# Altium PCB WorldClock.PcbDoc (part 10 of 13)
Units mil, origin at the board's own origin, x right, y up, seen from the top; angles counter-clockwise.
Board outline 3700 x 3850 mil, 2 copper layers (Top Layer, Bottom Layer); 227 components, 134 nets, 1324 pads, 248 vias.
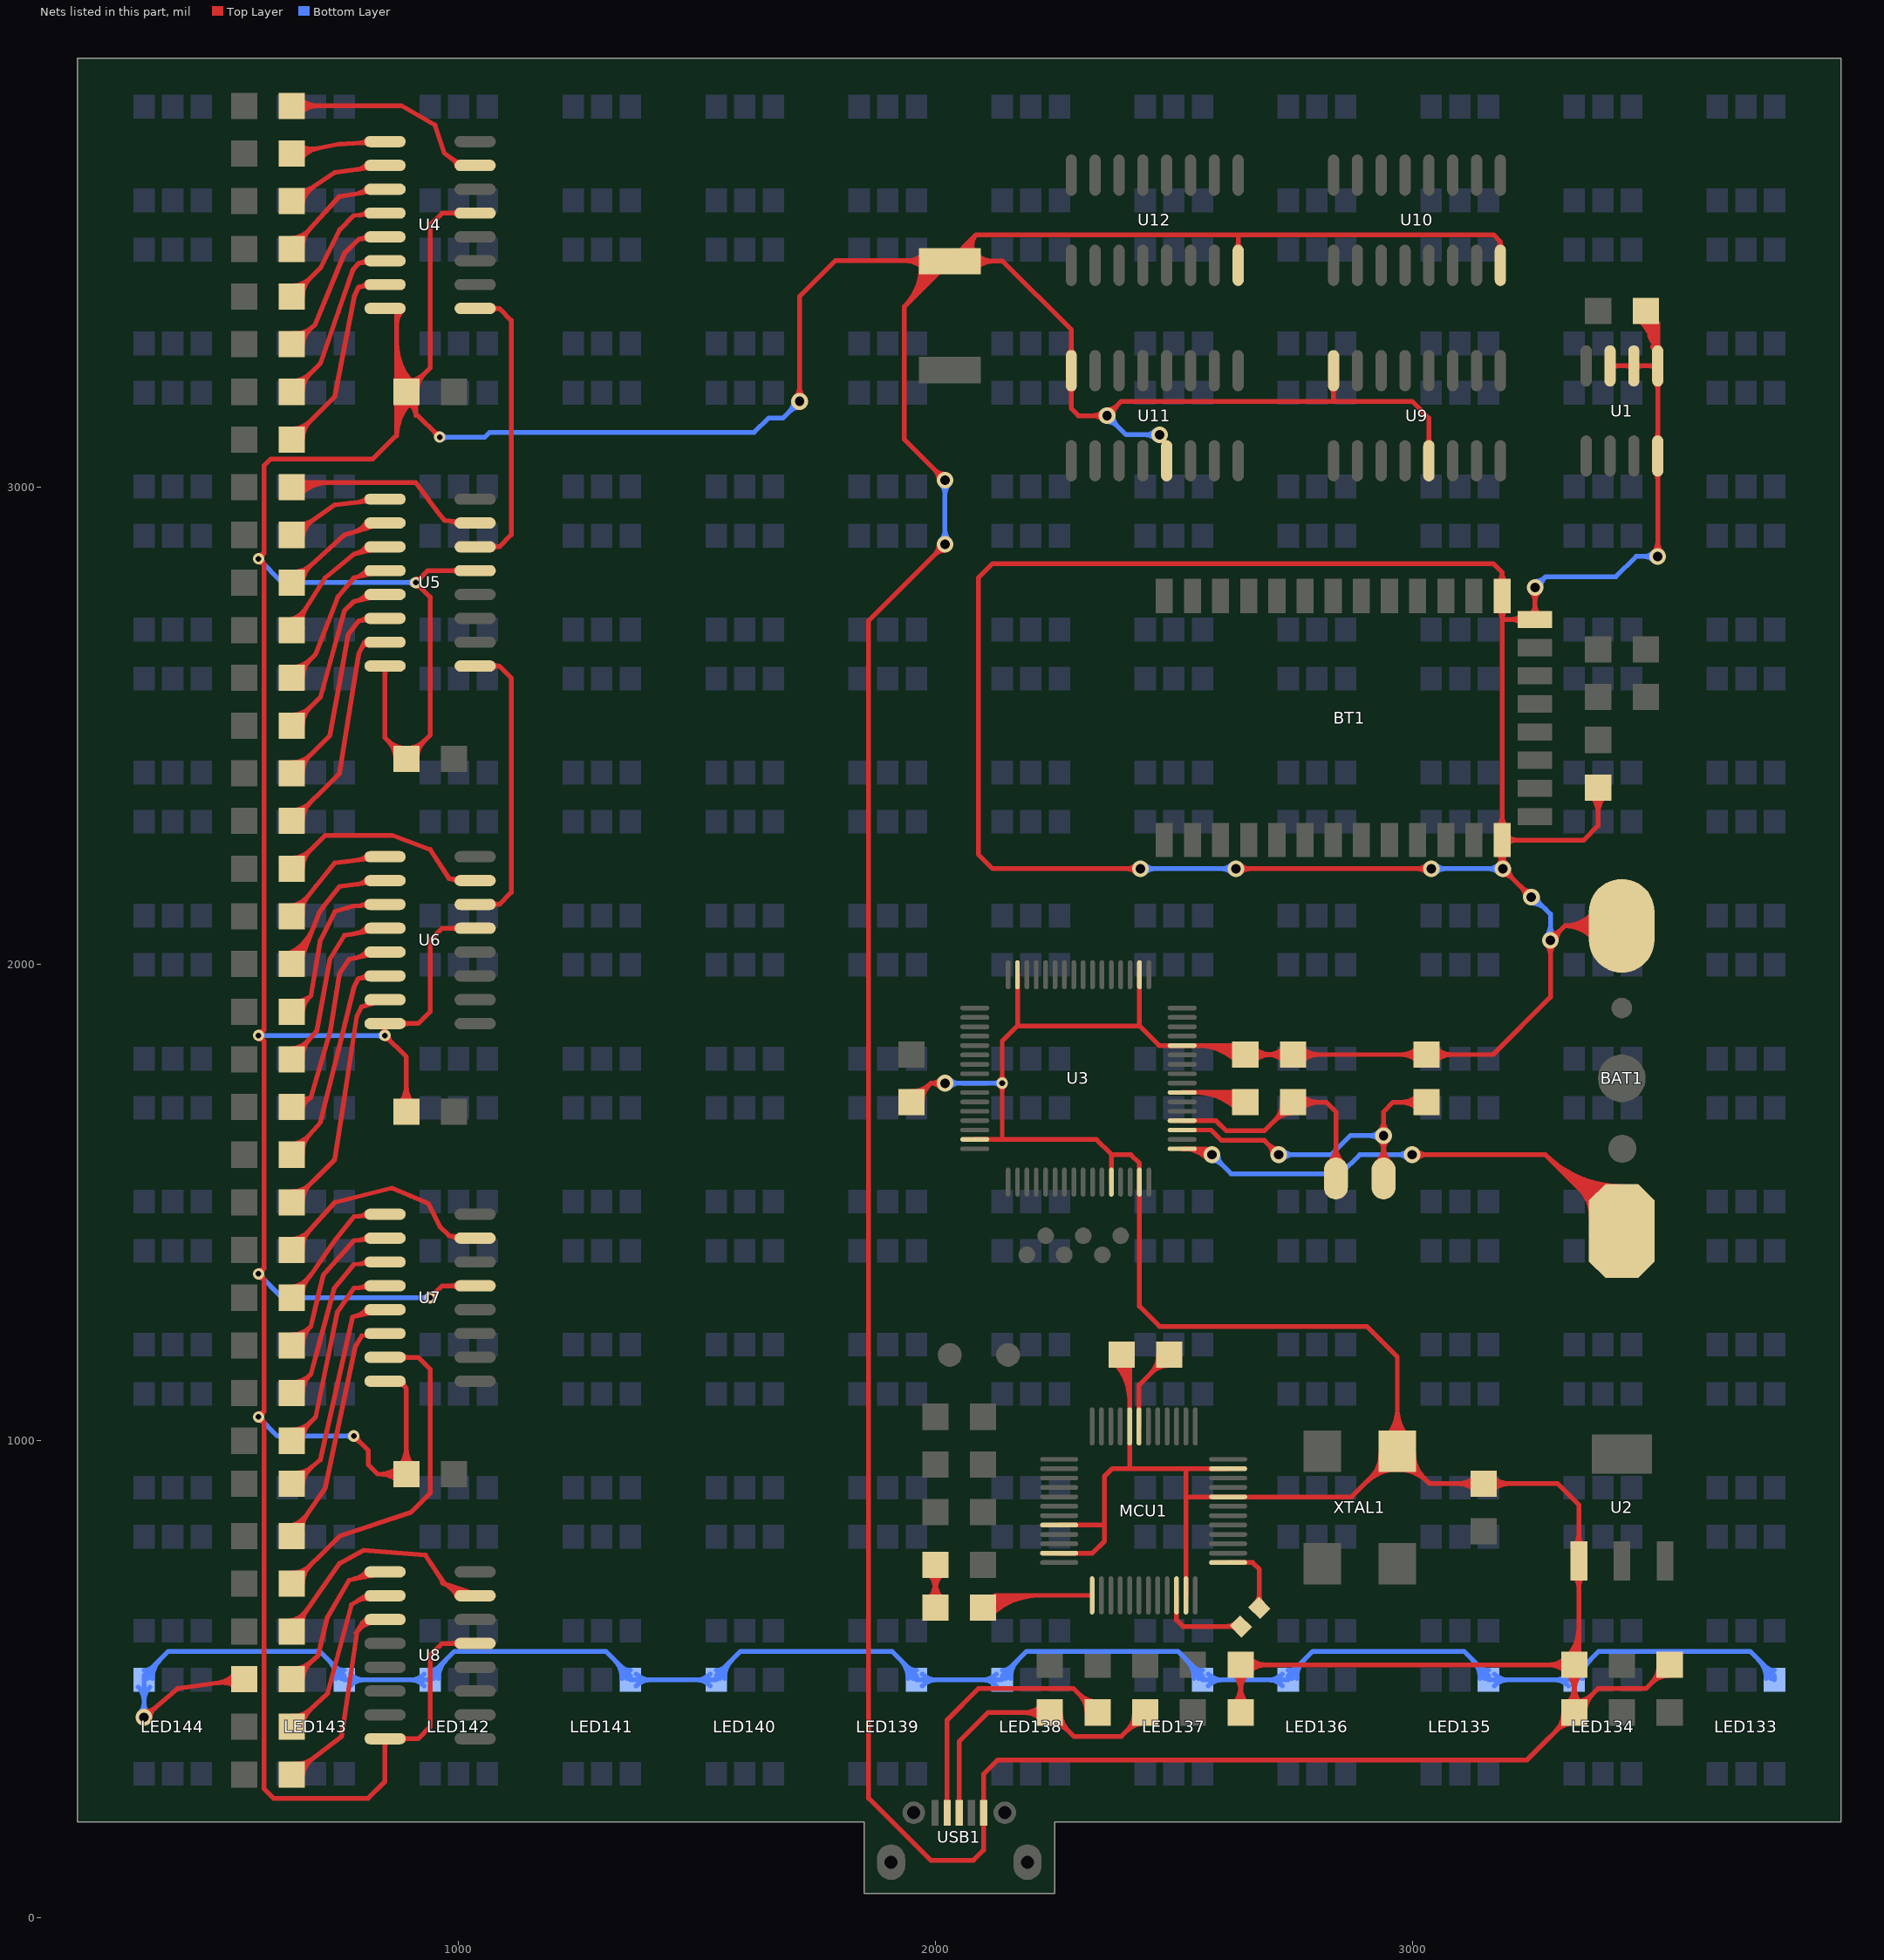
[diagram p10: the nets of this part, all layers, seen from the top]

## Via types
v1: diameter 35, hole 20, Top Layer to Bottom Layer, tented both sides, 213 vias
v2: diameter 24, hole 12, Top Layer to Bottom Layer, tented both sides, 35 vias

## Nets (pads, with @x,y where several pads share a name; then routed paths per layer and width w, separated by ;. In a path a pad name is that pad's centre, name@x,y a point inside that pad or via, vN(x,y) a via of type N, cw(c..) or ccw(c..) an arc to the next point about the centre after c; other vN are vias at no path point) (continued)
G12: LED133.3 LED134.1 LED135.3 LED136.1 LED137.3 LED138.1 LED139.3 LED140.1 LED141.3 LED142.1 LED143.3 LED144.1 R42.1 | length 6157.5
  Top Layer w10: v1(340,420) 410,480 R42.1@550,500 ; v1@340.96,432.46 ccw(c343.27,462.55) 362.91,439.64 ccw(c382.55,416.73) v1@352.46,419.04 ; R42.1@532,513.5 cw(c488.54,546.09) 496.23,492.32 cw(c503.91,438.54) R42.1@536.5,482 ; R42.1@540,507.5 cw(c515.86,525.61) 520.13,495.73 cw(c524.39,465.86) R42.1@542.5,490
  Bottom Layer w10: LED144.1@327.63,483.55 cw(c297.75,453.68) 340,453.68 cw(c382.25,453.68) LED144.1@352.37,483.55 ; v1@331.16,428.84 ccw(c309.82,450.18) 340,450.18 ccw(c370.18,450.18) v1@348.84,428.84 ; v1(340,420) LED144.1@340,498.43 340,507.14 391.29,558.43 708.71,558.43 760,507.14 LED143.3@760,498.43 LED142.1@940,498.43 940,507.14 991.29,558.43 1308.71,558.43 1360,507.14 LED141.3@1360,498.43 LED140.1@1540,498.43 1540,507.14 1591.29,558.43 1908.71,558.43 1960,507.14 LED139.3@1960,498.43 LED138.1@2140,498.43 2140,507.14 2191.29,558.43 2508.71,558.43 2560,507.14 LED137.3@2560,498.43 LED136.1@2740,498.43 2740,507.14 2791.29,558.43 3108.71,558.43 3160,507.14 LED135.3@3160,498.43 LED134.1@3340,498.43 3340,507.14 3391.29,558.43 3708.71,558.43 3760,507.14 LED133.3@3760,498.43 ; LED144.1@340,518.43 ccw(c340,545.67) 359.27,526.41 ; LED144.1@347.5,500.93 cw(c380.61,500.93) 357.2,524.34 ; LED144.1@357.5,500.93 cw(c414.75,500.93) 374.27,541.41 ; 725.73,541.41 cw(c685.25,500.93) LED143.3@742.5,500.93 ; 740.73,526.41 ccw(c760,545.67) LED143.3@760,518.43 ; 742.8,524.34 cw(c719.39,500.93) LED143.3@752.5,500.93 ; LED143.3@772.37,486.05 cw(c802.25,456.18) 802.25,498.43 cw(c802.25,540.67) LED143.3@772.37,510.8 ; LED142.1@927.63,486.05 ccw(c897.75,456.18) 897.75,498.43 ccw(c897.75,540.67) LED142.1@927.63,510.8 ; LED142.1@940,518.43 ccw(c940,545.67) 959.27,526.41 ; LED142.1@947.5,500.93 cw(c980.61,500.93) 957.2,524.34 ; LED142.1@957.5,500.93 cw(c1014.75,500.93) 974.27,541.41 ; 1325.73,541.41 cw(c1285.25,500.93) LED141.3@1342.5,500.93 ; 1340.73,526.41 ccw(c1360,545.67) LED141.3@1360,518.43 ; 1342.8,524.34 cw(c1319.39,500.93) LED141.3@1352.5,500.93 ; LED141.3@1372.37,486.05 cw(c1402.25,456.18) 1402.25,498.43 cw(c1402.25,540.67) LED141.3@1372.37,510.8 ; LED140.1@1527.63,486.05 ccw(c1497.75,456.18) 1497.75,498.43 ccw(c1497.75,540.67) LED140.1@1527.63,510.8 ; LED140.1@1540,518.43 ccw(c1540,545.67) 1559.27,526.41 ; LED140.1@1547.5,500.93 cw(c1580.61,500.93) 1557.2,524.34 ; LED140.1@1557.5,500.93 cw(c1614.75,500.93) 1574.27,541.41 ; 1925.73,541.41 cw(c1885.25,500.93) LED139.3@1942.5,500.93 ; 1940.73,526.41 ccw(c1960,545.67) LED139.3@1960,518.43 ; 1942.8,524.34 cw(c1919.39,500.93) LED139.3@1952.5,500.93 ; LED139.3@1972.37,486.05 cw(c2002.25,456.18) 2002.25,498.43 cw(c2002.25,540.67) LED139.3@1972.37,510.8 ; LED138.1@2127.63,486.05 ccw(c2097.75,456.18) 2097.75,498.43 ccw(c2097.75,540.67) LED138.1@2127.63,510.8 ; LED138.1@2140,518.43 ccw(c2140,545.67) 2159.27,526.41 ; LED138.1@2147.5,500.93 cw(c2180.61,500.93) 2157.2,524.34 ; LED138.1@2157.5,500.93 cw(c2214.75,500.93) 2174.27,541.41 ; 2525.73,541.41 cw(c2485.25,500.93) LED137.3@2542.5,500.93 ; 2540.73,526.41 ccw(c2560,545.67) LED137.3@2560,518.43 ; 2542.8,524.34 cw(c2519.39,500.93) LED137.3@2552.5,500.93 ; LED137.3@2572.37,486.05 cw(c2602.25,456.18) 2602.25,498.43 cw(c2602.25,540.67) LED137.3@2572.37,510.8 ; LED136.1@2727.63,486.05 ccw(c2697.75,456.18) 2697.75,498.43 ccw(c2697.75,540.67) LED136.1@2727.63,510.8 ; LED136.1@2740,518.43 ccw(c2740,545.67) 2759.27,526.41 ; LED136.1@2747.5,500.93 cw(c2780.61,500.93) 2757.2,524.34 ; LED136.1@2757.5,500.93 cw(c2814.75,500.93) 2774.27,541.41 ; 3125.73,541.41 cw(c3085.25,500.93) LED135.3@3142.5,500.93 ; 3140.73,526.41 ccw(c3160,545.67) LED135.3@3160,518.43 ; 3142.8,524.34 cw(c3119.39,500.93) LED135.3@3152.5,500.93 ; LED135.3@3172.37,486.05 cw(c3202.25,456.18) 3202.25,498.43 cw(c3202.25,540.67) LED135.3@3172.37,510.8 ; LED134.1@3327.63,486.05 ccw(c3297.75,456.18) 3297.75,498.43 ccw(c3297.75,540.67) LED134.1@3327.63,510.8 ; LED134.1@3340,518.43 ccw(c3340,545.67) 3359.27,526.41 ; LED134.1@3347.5,500.93 cw(c3380.61,500.93) 3357.2,524.34 ; LED134.1@3357.5,500.93 cw(c3414.75,500.93) 3374.27,541.41 ; 3725.73,541.41 cw(c3685.25,500.93) LED133.3@3742.5,500.93 ; 3740.73,526.41 ccw(c3760,545.67) LED133.3@3760,518.43 ; 3742.8,524.34 cw(c3719.39,500.93) LED133.3@3752.5,500.93
GND: BAT1.2 BT1.13 BT1.21 BT1.22 C1.1 C2.1 C3.1 C4.1 C5.2 C6.2 C7.1 C8.2 C9.1 C10.1 C11.1 C12.2 C13.2 C14.2 C15.2 C16.2 C17.2 C18.1 MCU1.8 MCU1.20 MCU1.23 MCU1.35 MCU1.44 MCU1.47 U1.4 U1.5 U1.6 U1.7 U2.1 U3.12 U3.18 U3.31 U3.47 U3.60 U3.63 U4.8 U4.13 U5.8 U5.13 U6.8 U6.13 U7.8 U7.13 U8.8 U8.13 U9.8 U9.13 U10.8 U11.8 U11.13 U12.8 USB1.5 XTAL1.2 | length 39367.2
  Top Layer w10: v2@580.19,1043 cw(c580.62,1027.62) 591.5,1038.5 ; v2@580.19,1057 ccw(c580.62,1072.38) 591.5,1061.5 ; v2@580.19,1343 cw(c580.62,1327.62) 591.5,1338.5 ; v2@580.19,1357 ccw(c580.62,1372.38) 591.5,1361.5 ; v2@580.19,1843 cw(c580.62,1827.62) 591.5,1838.5 ; v2@580.19,1857 ccw(c580.62,1872.38) 591.5,1861.5 ; v2@580.19,2843 cw(c580.62,2827.62) 591.5,2838.5 ; v2@580.19,2857 ccw(c580.62,2872.38) 591.5,2861.5 ; v2@587,1049.81 ccw(c602.38,1049.38) 591.5,1038.5 ; v2@587,1050.19 cw(c602.38,1050.62) 591.5,1061.5 ; v2@587,1349.81 ccw(c602.38,1349.38) 591.5,1338.5 ; v2@587,1350.19 cw(c602.38,1350.62) 591.5,1361.5 ; v2@587,1849.81 ccw(c602.38,1849.38) 591.5,1838.5 ; v2@587,1850.19 cw(c602.38,1850.62) 591.5,1861.5 ; v2@587,2849.81 ccw(c602.38,2849.38) 591.5,2838.5 ; v2@587,2850.19 cw(c602.38,2850.62) 591.5,2861.5 ; v2@780,1003 cw(c780,986.1) 791.95,998.05 cw(c803.9,1010) v2@787,1010 ; v2(780,1010) 810,980 810,950 830,930 C16.2@890,930 890,1110 ; v2@840.05,1854.95 ccw(c828.1,1866.9) 845,1866.9 ccw(c861.9,1866.9) v2@849.95,1854.95 ; U8.8@840.7,370.18 cw(c829.07,358.56) 845.51,358.56 cw(c861.95,358.56) U8.8@850.33,370.18 ; U6.8@840.7,1870.18 cw(c830.3,1859.79) v2@845,1859.79 ; U5.8@840.7,2620.18 cw(c829.07,2608.56) 845.51,2608.56 cw(c861.95,2608.56) U5.8@850.33,2620.18 ; v2@841.38,1855.99 ccw(c838.19,1861.3) 844.17,1862.9 ; v2@841.5,1856.06 ccw(c836.28,1865.09) 846.36,1862.4 ; v2@845,1843 cw(c845,1826.1) 856.95,1838.05 cw(c868.9,1850) v2@852,1850 ; v2@845,1857.32 cw(c863.19,1857.32) U6.8@850.33,1870.18 ; U6.8@845,1874.49 v2(845,1850) 890,1805 C14.2@890,1690 ; U7.8@845.51,1125 875,1125 890,1110 ; U6.8@845.51,1875 915,1875 940,1900 940,2050 965,2075 U6.13@1034.49,2075 ; U5.8@845.51,2625 845.51,2474.49 C17.2@890,2430 940,2480 940,2770 v2(910,2800) 935,2825 U5.13@1034.49,2825 ; U4.8@845.51,3375 845,3374.49 860.51,3374.49 870,3365 870,3220 C15.2@890,3200 ; U6.8@846.59,1863.25 ccw(c853.59,1861.37) v2@849.22,1855.59 ; C17.2@867.5,2430 ccw(c813.18,2430) 851.59,2468.41 ccw(c890,2506.82) 890,2452.5 ccw(c890,2506.82) 928.41,2468.41 ccw(c966.82,2430) C17.2@912.5,2430 ; 870,3107.81 cw(c968.74,3107.81) C15.2@904.61,3182.89 ; 870,3129.5 cw(c950.21,3129.5) C15.2@898.12,3190.5 ; 870,3151.19 cw(c931.69,3151.19) C15.2@891.62,3198.1 ; C15.2@870,3172.88 cw(c913.16,3172.88) C15.2@885.13,3205.7 ; 870,3230.18 ccw(c920.18,3230.18) C15.2@884.7,3194.7 ; 870,3254.32 ccw(c944.32,3254.32) C15.2@891.77,3201.77 ; 870,3278.46 ccw(c968.46,3278.46) C15.2@898.84,3208.84 ; 870,3302.6 ccw(c992.6,3302.6) C15.2@905.91,3215.91 ; 870,3341.64 cw(c910.37,3341.64) U4.8@881.82,3370.18 ; C16.2@874.09,914.09 ccw(c835.68,875.68) 835.68,930 ccw(c835.68,984.32) 874.09,945.91 ccw(c835.68,984.32) 890,984.32 ccw(c944.32,984.32) C16.2@905.91,945.91 ; C14.2@874.09,1705.91 ccw(c835.68,1744.32) 890,1744.32 ccw(c944.32,1744.32) C14.2@905.91,1705.91 ; U7.8@877.01,1118.19 cw(c877.01,1106.59) 885.21,1114.79 ; C17.2@877.5,2430 ccw(c847.32,2430) 868.66,2451.34 ccw(c890,2472.68) 890,2442.5 ccw(c890,2472.68) 911.34,2451.34 ccw(c932.68,2430) C17.2@902.5,2430 ; C16.2@881.16,921.16 ccw(c859.82,899.82) 859.82,930 ccw(c859.82,960.18) 881.16,938.84 ccw(c859.82,960.18) 890,960.18 ccw(c920.18,960.18) C16.2@898.84,938.84 ; C14.2@881.16,1698.84 ccw(c859.82,1720.18) 890,1720.18 ccw(c920.18,1720.18) C14.2@898.84,1698.84 ; U8.8@881.82,370.18 cw(c893.45,358.56) 893.45,375 cw(c893.45,391.44) U8.8@881.82,379.82 ; U6.8@881.82,1870.18 cw(c893.45,1858.56) 893.45,1875 cw(c893.45,1891.44) U6.8@881.82,1879.82 ; U7.8@883.82,1124.98 ccw(c904.92,1124.92) 890,1110 ; C15.2@886.71,3177.74 cw(c882.72,3150.76) 910,3150.76 ; C15.2@888.17,3187.63 cw(c884.43,3162.34) 910,3162.34 ; C15.2@889.63,3197.53 cw(c886.15,3173.93) C15.2@910,3173.93 ; C15.2@890,3212.5 ccw(c890,3242.68) 911.34,3221.34 ccw(c932.68,3200) C15.2@902.5,3200 ; C15.2@890,3222.5 ccw(c890,3276.82) 928.41,3238.41 ccw(c966.82,3200) C15.2@912.5,3200 ; v2@910,2793 cw(c910,2776.1) 921.95,2788.05 cw(c933.9,2800) 917,2800 cw(c933.9,2800) 921.95,2811.95 cw(c910,2823.9) v2@910,2807 ; v2(940,1300) 965,1325 U7.13@1034.49,1325 ; v2@940,1307 ccw(c940,1323.9) 951.95,1311.95 ccw(c963.9,1300) v2@947,1300 ; v2@953,3105 ccw(c936.1,3105) 948.05,3116.95 ccw(c960,3128.9) v2@960,3112 ; v2(960,3105) 910,3155 910,3180 C15.2@890,3200 ; U8.13@998.18,570.18 ccw(c986.55,558.56) 986.55,575 ccw(c986.55,591.44) U8.13@998.18,579.82 ; U7.13@998.18,1320.18 ccw(c986.55,1308.56) 986.55,1325 ccw(c986.55,1341.44) U7.13@998.18,1329.82 ; U6.13@998.18,2070.18 ccw(c986.55,2058.56) 986.55,2075 ccw(c986.55,2091.44) U6.13@998.18,2079.82 ; U5.13@998.18,2820.18 ccw(c986.55,2808.56) 986.55,2825 ccw(c986.55,2841.44) U5.13@998.18,2829.82 ; U4.13@998.18,3570.18 ccw(c986.55,3558.56) 986.55,3575 ccw(c986.55,3591.44) U4.13@998.18,3579.82 ; U8.13@1034.49,575 965,575 940,550 940,400 915,375 U8.8@845.51,375 845.51,285.51 810,250 611.5,250 591.5,270 591.5,1038.5 ; U4.13@1034.49,3575 965,3575 940,3550 940,3250 C15.2@890,3200 ; v1@1706.16,3188.84 ccw(c1684.82,3210.18) 1715,3210.18 ccw(c1745.18,3210.18) v1@1723.84,3188.84 ; v1(1715,3180) 1715,3400 1790,3475 2029.17,3475 C13.2@2030,3474.17 ; 1935,3379.18 ccw(c1849.64,3464.54) C13.2@1970.09,3472.66 ; 1936.14,3475 cw(c1936.14,3417.71) C13.2@1976.65,3458.22 ; 1940.13,3475 ccw(c1940.13,3526.64) C13.2@1976.65,3490.12 ; C2.1@1950,1710 1990,1750 ; C2.1@1950,1722.5 ccw(c1950,1752.68) 1971.34,1731.34 ccw(c1992.68,1710) C2.1@1962.5,1710 ; C2.1@1950,1732.5 ccw(c1950,1786.82) 1988.41,1748.41 ccw(c2026.82,1710) C2.1@1972.5,1710 ; 1950.57,3394.75 ccw(c1878.81,3466.51) C13.2@1980.07,3473.33 ; 1960.28,3475 cw(c1960.28,3441.86) C13.2@1983.72,3465.29 ; 1964.27,3475 ccw(c1964.27,3502.5) C13.2@1983.72,3483.05 ; 1966.14,3410.31 ccw(c1907.98,3468.47) C13.2@1990.05,3474 ; 1981.71,3425.88 ccw(c1937.15,3470.44) C13.2@2000.02,3474.67 ; 1997.28,3441.45 ccw(c1966.33,3472.4) C13.2@2010,3475.35 ; v1@2007.5,2880 cw(c1977.32,2880) 1998.66,2858.66 cw(c2020,2837.32) v1@2020,2867.5 ; v1@2007.5,3015 ccw(c1977.32,3015) 1998.66,3036.34 ccw(c2020,3057.68) v1@2020,3027.5 ; v1@2011.12,1741.2 ccw(c1990,1720.25) 1990,1750 ; v1@2011.12,1758.8 cw(c1990,1779.75) 1990,1750 ; v1(2020,1750) 1990,1750 ; v1(2020,2880) 1860,2720 1860,250 1990,120 2080,120 2101,141 USB1.5@2101,220 2101,301 2130,330 3240,330 C7.1@3340,430 ; v1(2020,3015) 1935,3100 1935,3379.17 C13.2@2030,3474.17 ; C13.2@2054.41,3462.54 cw(c2074.51,3480.53) C13.2@2055.43,3499.6 ; C13.2@2061.86,3469.21 cw(c2082.39,3487.59) 2062.91,3507.08 ; C13.2@2069.31,3475.88 cw(c2090.28,3494.65) 2070.38,3514.55 ; C13.2@2076.28,3465.29 cw(c2097.72,3443.85) 2097.72,3474.17 cw(c2097.72,3504.49) C13.2@2076.28,3483.05 ; C13.2@2076.76,3482.55 cw(c2098.17,3501.71) 2077.85,3522.03 ; U3.47@2082.48,1632.05 2140,1632.05 ; C13.2@2083.35,3458.22 cw(c2121.86,3419.71) 2121.86,3474.17 cw(c2121.86,3528.64) C13.2@2083.35,3490.12 ; C13.2@2084.21,3489.22 cw(c2106.06,3508.77) 2085.33,3529.5 ; v2@2135.05,1745.05 cw(c2123.1,1733.1) 2140,1733.1 cw(c2156.9,1733.1) v2@2144.95,1745.05 ; v2@2135.05,1754.95 ccw(c2123.1,1766.9) 2140,1766.9 ccw(c2156.9,1766.9) v2@2144.95,1754.95 ; U3.31@2172.05,1977.52 2172.05,1870 ; MCU1.23@2259.57,764.25 2329.25,764.25 2354.5,789.5 2354.5,925 2370.92,941.42 2530,941.42 ; MCU1.20@2259.57,823.31 2352.81,823.31 ; U11.8@2280.18,3208.18 cw(c2268.56,3196.55) 2285,3196.55 cw(c2301.44,3196.55) U11.8@2289.82,3208.18 ; U11.8@2280.18,3280.8 ccw(c2268.56,3292.43) 2285,3292.43 ccw(c2301.44,3292.43) U11.8@2289.82,3280.8 ; v1@2351.16,3141.16 ccw(c2329.82,3119.82) 2329.82,3150 ccw(c2329.82,3180.18) v1@2351.16,3158.84 ; v1@2360,3162.5 ccw(c2360,3192.68) 2381.34,3171.34 ccw(c2402.68,3150) v1@2372.5,3150 ; U3.60@2368.9,1542.48 2368.9,1601.1 2337.95,1632.05 2140,1632.05 ; 2368.9,1600 2410,1600 2427.95,1582.05 U3.63@2427.95,1542.48 2427.95,1282.05 2470,1240 2905,1240 2968.74,1176.26 XTAL1.2@2968.74,978.11 ; C5.2@2374.37,1164.46 cw(c2295.11,1085.2) 2407.2,1085.2 ; C5.2@2381.44,1171.53 cw(c2319.25,1109.34) 2407.2,1109.34 ; C5.2@2388.52,1178.6 cw(c2343.4,1133.48) 2407.2,1133.48 ; C5.2@2390.28,1180.37 2407.2,1163.45 MCU1.8@2407.2,1030 2407.2,943.62 ; C5.2@2395.59,1185.67 cw(c2367.54,1157.63) C5.2@2407.2,1157.63 ; v1@2421.16,2191.16 ccw(c2399.82,2169.82) 2399.82,2200 ccw(c2399.82,2230.18) v1@2421.16,2208.84 ; U3.18@2427.95,1977.52 2427.95,1870 ; v1(2430,2200) 2120,2200 2090,2230 2090,2810 2120,2840 3170,2840 3188.66,2821.34 BT1.22@3188.66,2771.81 BT1.13@3188.66,2260 ; MCU1.35@2525.31,675.67 2525.31,880 ; 2550.06,1828.9 cw(c2550.06,1710.06) C12.2@2634.09,1794.09 ; 2574.2,1828.9 cw(c2574.2,1734.2) C12.2@2641.16,1801.16 ; 2598.34,1828.9 cw(c2598.34,1758.34) C12.2@2648.23,1808.23 ; MCU1.47@2613.9,941.42 2530,941.42 ; 2622.48,1828.9 cw(c2622.48,1782.48) C12.2@2655.3,1815.3 ; C4.1@2624.09,445.91 ccw(c2585.68,484.32) 2640,484.32 ccw(c2694.32,484.32) C4.1@2655.91,445.91 ; C3.1@2624.09,514.09 cw(c2585.68,475.68) 2640,475.68 cw(c2694.32,475.68) 2655.91,514.09 cw(c2694.32,475.68) 2694.32,530 cw(c2694.32,584.32) C3.1@2655.91,545.91 ; v1(2630,2200) v1(3040,2200) ; U12.8@2630.18,3501.82 ccw(c2618.56,3513.45) 2635,3513.45 ccw(c2651.44,3513.45) U12.8@2639.82,3501.82 ; C4.1@2631.16,438.84 ccw(c2609.82,460.18) 2640,460.18 ccw(c2670.18,460.18) C4.1@2648.84,438.84 ; C3.1@2631.16,521.16 cw(c2609.82,499.82) 2640,499.82 cw(c2670.18,499.82) 2648.84,521.16 cw(c2670.18,499.82) 2670.18,530 cw(c2670.18,560.18) C3.1@2648.84,538.84 ; U12.8@2635,3465.51 2635,3529.5 ; v1@2638.84,2191.16 cw(c2660.18,2169.82) 2660.18,2200 cw(c2660.18,2230.18) v1@2638.84,2208.84 ; C4.1@2640,430 2640,504.54 2658,522.54 C3.1@2658,530 ; C3.1@2640,530 C3.1@2658,530 ; C12.2@2658.84,1801.16 cw(c2680.18,1779.82) 2680.18,1810 cw(c2680.18,1840.18) C12.2@2658.84,1818.84 ; C12.2@2665.91,1794.09 cw(c2704.32,1755.68) 2704.32,1810 cw(c2704.32,1864.32) C12.2@2665.91,1825.91 ; C11.1@2734.09,1794.09 ccw(c2695.68,1755.68) 2695.68,1810 ccw(c2695.68,1864.32) C11.1@2734.09,1825.91 ; C11.1@2741.16,1801.16 ccw(c2719.82,1779.82) 2719.82,1810 ccw(c2719.82,1840.18) C11.1@2741.16,1818.84 ; C11.1@2758.84,1801.16 cw(c2780.18,1779.82) 2780.18,1810 cw(c2780.18,1840.18) C11.1@2758.84,1818.84 ; C11.1@2765.91,1794.09 cw(c2804.32,1755.68) 2804.32,1810 cw(c2804.32,1864.32) C11.1@2765.91,1825.91 ; U9.8@2830.18,3208.18 cw(c2818.56,3196.55) 2835,3196.55 cw(c2851.44,3196.55) U9.8@2839.82,3208.18 ; 2835,3185 U9.8@2835,3244.49 ; 2903.35,912.72 cw(c2968.74,847.32) 2968.74,939.8 cw(c2968.74,847.32) 3034.13,912.72 ; 2912.85,922.22 ccw(c2860.9,974.17) XTAL1.2@2934.37,974.17 ; 2920.42,929.79 cw(c2968.74,881.46) 2968.74,949.8 cw(c2968.74,881.46) 3017.06,929.79 ; XTAL1.2@2929.92,939.29 ccw(c2895.04,974.17) XTAL1.2@2944.37,974.17 ; XTAL1.2@2937.49,946.86 cw(c2968.74,915.61) 2968.74,959.8 cw(c2968.74,915.61) XTAL1.2@2999.99,946.86 ; XTAL1.2@2944.44,1006.35 ccw(c2885.76,1065.02) 2968.74,1065.02 ccw(c3051.72,1065.02) XTAL1.2@2993.04,1006.35 ; XTAL1.2@2951.51,999.28 ccw(c2909.91,1040.88) 2968.74,1040.88 ccw(c3027.57,1040.88) XTAL1.2@2985.97,999.28 ; XTAL1.2@2993.11,974.17 ccw(c3042.44,974.17) XTAL1.2@3007.56,939.29 ; XTAL1.2@3003.11,974.17 ccw(c3076.58,974.17) 3024.63,922.22 ; C10.1@3014.09,1794.09 ccw(c2975.68,1755.68) 2975.68,1810 ccw(c2975.68,1864.32) C10.1@3014.09,1825.91 ; C10.1@3021.16,1801.16 ccw(c2999.82,1779.82) 2999.82,1810 ccw(c2999.82,1840.18) C10.1@3021.16,1818.84 ; U9.13@3030.18,3091.82 ccw(c3018.56,3103.45) 3035,3103.45 ccw(c3051.44,3103.45) U9.13@3039.82,3091.82 ; v1@3031.16,2191.16 ccw(c3009.82,2169.82) 3009.82,2200 ccw(c3009.82,2230.18) v1@3031.16,2208.84 ; U9.13@3035,3055.51 3035,3145 3000,3180 2390,3180 v1(2360,3150) 2300,3150 2285,3165 U11.8@2285,3244.49 2285,3330 2140.83,3474.17 C13.2@2030,3474.17 ; C10.1@3038.84,1801.16 cw(c3060.18,1779.82) 3060.18,1810 cw(c3060.18,1840.18) C10.1@3038.84,1818.84 ; C10.1@3045.91,1794.09 cw(c3084.32,1755.68) 3084.32,1810 cw(c3084.32,1864.32) C10.1@3045.91,1825.91 ; C1.1@3134.09,894.09 ccw(c3095.68,855.68) 3095.68,910 ccw(c3095.68,964.32) C1.1@3134.09,925.91 ; C1.1@3141.16,901.16 ccw(c3119.82,879.82) 3119.82,910 ccw(c3119.82,940.18) C1.1@3141.16,918.84 ; C1.1@3158.84,901.16 cw(c3180.18,879.82) 3180.18,910 cw(c3180.18,940.18) C1.1@3158.84,918.84 ; C1.1@3165.91,894.09 cw(c3204.32,855.68) 3204.32,910 cw(c3204.32,964.32) C1.1@3165.91,925.91 ; BT1.13@3179.47,2232.81 cw(c3157.28,2210.62) 3188.66,2210.62 cw(c3220.05,2210.62) BT1.13@3197.85,2232.81 ; BT1.13@3179.47,2287.19 ccw(c3157.28,2309.38) 3188.66,2309.38 ccw(c3220.05,2309.38) BT1.13@3197.85,2287.19 ; BT1.22@3179.47,2744.62 cw(c3157.28,2722.43) 3188.66,2722.43 cw(c3220.05,2722.43) BT1.22@3197.85,2744.62 ; BT1.22@3179.47,2799 ccw(c3157.28,2821.2) 3188.66,2821.2 ccw(c3220.05,2821.2) BT1.22@3197.85,2799 ; U10.8@3180.18,3501.82 ccw(c3168.56,3513.45) 3185,3513.45 ccw(c3201.44,3513.45) U10.8@3189.82,3501.82 ; v1@3181.11,2208.79 ccw(c3169.96,2219.82) 3185.11,2223.87 ccw(c3204.24,2229) v1@3195.51,2211.22 ; v1@3181.16,2208.84 ccw(c3163.05,2226.95) BT1.13@3188.66,2226.95 ; v1@3184.26,2211.1 ccw(c3178.1,2223.02) 3191.05,2219.55 ccw(c3197.68,2217.77) v1@3194.96,2211.47 ; U10.8@3185,3465.51 3185,3515 3170.5,3529.5 2085.33,3529.5 ; v1@3188.66,2206.34 BT1.13@3188.66,2260 ; BT1.13@3188.66,2233.41 ccw(c3223.41,2233.41) v1@3198.84,2208.84 ; v1@3190,2187.5 cw(c3190,2157.32) 3211.34,2178.66 cw(c3232.68,2200) v1@3202.5,2200 ; v1(3190,2200) v1(3250,2140) ; 3191.26,2722.6 BT1.21@3257.56,2722.6 v1(3257.56,2790) ; BT1.13@3197.85,2250.81 cw(c3220.05,2228.62) 3220.05,2260 cw(c3220.05,2291.38) BT1.13@3197.85,2269.19 ; BT1.21@3230.37,2713.41 ccw(c3208.17,2691.21) 3208.17,2722.6 ccw(c3208.17,2753.98) BT1.21@3230.37,2731.79 ; v1@3237.5,2140 ccw(c3207.32,2140) 3228.66,2161.34 ccw(c3250,2182.68) v1@3250,2152.5 ; BT1.21@3248.37,2731.79 ccw(c3226.17,2753.98) 3257.56,2753.98 ccw(c3288.94,2753.98) BT1.21@3266.75,2731.79 ; v1@3248.72,2781.16 cw(c3227.38,2759.82) 3257.56,2759.82 cw(c3287.74,2759.82) v1@3266.4,2781.16 ; v1@3281.16,2041.16 cw(c3259.82,2019.82) 3290,2019.82 cw(c3320.18,2019.82) v1@3298.84,2041.16 ; v1@3290,2062.5 ccw(c3290,2092.68) 3311.34,2071.34 ccw(c3332.68,2050) v1@3302.5,2050 ; C7.1@3317.5,430 cw(c3263.18,430) 3301.59,391.59 cw(c3340,353.18) C7.1@3340,407.5 ; C7.1@3324.09,445.91 ccw(c3285.68,484.32) 3340,484.32 ccw(c3394.32,484.32) C7.1@3355.91,445.91 ; C7.1@3327.5,430 cw(c3297.32,430) 3318.66,408.66 cw(c3340,387.32) C7.1@3340,417.5 ; C7.1@3331.16,438.84 ccw(c3309.82,460.18) 3340,460.18 ccw(c3370.18,460.18) C7.1@3348.84,438.84 ; C8.2@3338.23,531.77 ccw(c3311.15,558.85) 3349.45,558.85 ; C7.1@3340,442.5 ccw(c3340,472.68) 3361.34,451.34 ccw(c3382.68,430) C7.1@3352.5,430 ; C7.1@3340,452.5 ccw(c3340,506.82) 3378.41,468.41 ccw(c3416.82,430) C7.1@3362.5,430 ; U2.1@3340.46,715.18 cw(c3318.75,693.47) 3349.45,693.47 cw(c3380.15,693.47) U2.1@3358.44,715.18 ; U2.1@3340.46,780.41 ccw(c3318.75,802.12) 3349.45,802.12 ccw(c3380.15,802.12) U2.1@3358.44,780.41 ; C8.2@3348.84,521.16 ccw(c3370.18,499.82) 3340,499.82 ccw(c3309.82,499.82) 3331.16,521.16 ccw(c3309.82,499.82) 3309.82,530 ccw(c3309.82,560.18) 3331.16,538.84 ccw(c3287.01,582.99) 3349.45,582.99 ; 3349.45,561.51 ccw(c3371.51,561.51) C8.2@3355.91,545.91 ; 3349.45,607.13 cw(c3262.87,607.13) 3324.09,545.91 cw(c3285.68,584.32) 3285.68,530 cw(c3285.68,475.68) 3324.09,514.09 cw(c3285.68,475.68) 3340,475.68 cw(c3394.32,475.68) C8.2@3355.91,514.09 ; C9.1@3374.09,2354.09 cw(c3335.68,2315.68) 3390,2315.68 cw(c3444.32,2315.68) C9.1@3405.91,2354.09 ; C9.1@3381.16,2361.16 cw(c3359.82,2339.82) 3390,2339.82 cw(c3420.18,2339.82) C9.1@3398.84,2361.16 ; BAT1.2@3386.5,2044.56 ccw(c3320.07,2000.17) 3320.07,2080.06 ; BAT1.2@3386.5,2115.57 cw(c3320.07,2159.96) 3320.07,2080.06 ; C9.1@3390,2370 3390,2290 3360,2260 BT1.13@3188.66,2260 ; BAT1.2@3394.81,2050.12 ccw(c3338.78,2012.67) 3338.78,2080.06 ccw(c3338.78,2147.45) BAT1.2@3394.81,2110.01 ; BAT1.2@3403.12,2055.67 ccw(c3357.49,2025.18) 3357.49,2080.06 ccw(c3357.49,2134.95) BAT1.2@3403.12,2104.45 ; U1.7@3415,3254.49 U1.6@3465,3254.49 U1.5@3515,3254.49 ; U1.7@3419.82,3249.67 cw(c3431.44,3238.05) 3431.44,3254.49 cw(c3431.44,3270.93) U1.7@3419.82,3259.3 ; BAT1.2@3439.62,2080.06 3320.06,2080.06 ; U1.6@3460.18,3249.67 ccw(c3448.56,3238.05) 3448.56,3254.49 ccw(c3448.56,3270.93) U1.6@3460.18,3259.3 ; U1.6@3469.82,3249.67 cw(c3481.44,3238.05) 3481.44,3254.49 cw(c3481.44,3270.93) U1.6@3469.82,3259.3 ; C18.1@3474.09,3354.09 cw(c3375.32,3255.32) U1.5@3515,3255.32 ; C18.1@3481.16,3361.16 cw(c3399.47,3279.47) U1.5@3515,3279.47 ; C18.1@3488.23,3368.23 cw(c3423.61,3303.61) 3515,3303.61 ; C18.1@3490,3370 3515,3345 U1.5@3515,3254.49 ; C18.1@3495.3,3375.3 cw(c3447.75,3327.75) 3515,3327.75 ; 3498.12,3318.32 ccw(c3540.17,3329.59) U1.5@3518.41,3291.88 ; 3504.37,3295 ccw(c3523.1,3300.02) U1.5@3513.41,3283.22 ; v1@3506.16,2863.84 ccw(c3484.82,2885.18) 3515,2885.18 ccw(c3545.18,2885.18) v1@3523.84,2863.84 ; U1.5@3509.28,3289.69 ccw(c3499.39,3296.09) 3510.91,3298.56 ; 3509.53,3305 ccw(c3530.17,3309.42) U1.5@3518.7,3291.7 ; U1.4@3510.18,3029.2 cw(c3498.56,3017.57) 3515,3017.57 cw(c3531.44,3017.57) U1.4@3519.82,3029.2 ; U1.4@3510.18,3101.82 ccw(c3498.56,3113.45) 3515,3113.45 ccw(c3531.44,3113.45) U1.4@3519.82,3101.82 ; U1.5@3510.18,3218.18 cw(c3498.56,3206.55) 3515,3206.55 cw(c3531.44,3206.55) U1.5@3519.82,3218.18 ; U1.5@3510.18,3249.67 ccw(c3498.56,3238.05) 3498.56,3254.49 ccw(c3498.56,3270.93) U1.5@3510.18,3259.3 ; U1.5@3510.18,3290.8 ccw(c3498.56,3302.43) 3515,3302.43 ccw(c3531.44,3302.43) U1.5@3519.82,3290.8 ; v1(3515,2855) U1.4@3515,3065.51 U1.5@3515,3254.49 ; C6.2@3517.5,530 cw(c3463.18,530) 3501.59,491.59 cw(c3540,453.18) C6.2@3540,507.5 ; C6.2@3527.5,530 cw(c3497.32,530) 3518.66,508.66 cw(c3540,487.32) C6.2@3540,517.5 ; C6.2@3540,530 3490,480 3390,480 C7.1@3340,430 ; 591.5,1038.5 v2(580,1050) 591.5,1061.5 ; 591.5,1061.5 591.5,1338.5 ; 591.5,1338.5 v2(580,1350) 591.5,1361.5 ; 591.5,1361.5 591.5,1838.5 ; 591.5,1838.5 v2(580,1850) 591.5,1861.5 ; 591.5,1861.5 591.5,2838.5 ; 591.5,2838.5 v2(580,2850) 591.5,2861.5 ; 591.5,2861.5 591.5,3045 606,3059.5 819.5,3059.5 870,3110 870,3180 C15.2@890,3200 ; C13.2@2030,3474.17 2085.33,3529.5 ; 2140,1632.05 v2(2140,1750) 2140,1837.95 2172.05,1870 ; 2172.05,1870 2172.55,1869.5 2427.45,1869.5 2427.95,1870 ; 2427.95,1870 2469.06,1828.9 U3.12@2517.52,1828.9 2631.1,1828.9 C12.2@2650,1810 C11.1@2750,1810 C10.1@3030,1810 3169.56,1810 3290,1930.44 v1(3290,2050) 3320.06,2080.06 ; 2525.31,880 2525.31,936.73 2530,941.42 ; 2525.31,880 2527.68,882.36 MCU1.44@2613.9,882.36 2872.99,882.36 XTAL1.2@2968.74,978.11 ; C3.1@2658,530 C8.2@3340,530 ; XTAL1.2@2968.74,978.11 3036.85,910 C1.1@3150,910 3305,910 3349.45,865.55 U2.1@3349.45,747.8 3349.45,539.45 C8.2@3340,530 ; C7.1@3340,430 C8.2@3340,530
  Bottom Layer w10: v2@580,1043 cw(c580,1026.1) 591.95,1038.05 cw(c603.9,1050) v2@587,1050 ; v2(580,1050) 620,1010 v2(780,1010) ; v2@580,1343 cw(c580,1326.1) 591.95,1338.05 cw(c603.9,1350) v2@587,1350 ; v2(580,1350) 630,1300 v2(940,1300) ; v2(580,1850) v2(845,1850) ; v2@580,2843 cw(c580,2826.1) 591.95,2838.05 cw(c603.9,2850) v2@587,2850 ; v2(580,2850) 630,2800 v2(910,2800) ; v2@584.95,1845.05 cw(c596.9,1833.1) 596.9,1850 cw(c596.9,1866.9) v2@584.95,1854.95 ; v2@775.05,1005.05 ccw(c763.1,993.1) 763.1,1010 ccw(c763.1,1026.9) v2@775.05,1014.95 ; v2@840.05,1845.05 ccw(c828.1,1833.1) 828.1,1850 ccw(c828.1,1866.9) v2@840.05,1854.95 ; v2@905.05,2795.05 ccw(c893.1,2783.1) 893.1,2800 ccw(c893.1,2816.9) v2@905.05,2804.95 ; v2@935.05,1295.05 ccw(c923.1,1283.1) 923.1,1300 ccw(c923.1,1316.9) v2@935.05,1304.95 ; v2(960,3105) 1055,3105 1065,3115 1619.64,3115 1649.64,3145 1680,3145 v1(1715,3180) ; v2@964.95,3100.05 cw(c976.9,3088.1) 976.9,3105 cw(c976.9,3121.9) v2@964.95,3109.95 ; v1@1702.5,3180 cw(c1672.32,3180) 1693.66,3158.66 cw(c1715,3137.32) v1@1715,3167.5 ; v1@2011.16,2888.84 ccw(c1989.82,2910.18) 2020,2910.18 ccw(c2050.18,2910.18) v1@2028.84,2888.84 ; v1@2011.16,3006.16 cw(c1989.82,2984.82) 2020,2984.82 cw(c2050.18,2984.82) v1@2028.84,3006.16 ; v1(2020,1750) v2(2140,1750) ; v1(2020,2880) v1(2020,3015) ; v1@2028.84,1741.16 cw(c2050.18,1719.82) 2050.18,1750 cw(c2050.18,1780.18) v1@2028.84,1758.84 ; v2@2135.05,1745.05 ccw(c2123.1,1733.1) 2123.1,1750 ccw(c2123.1,1766.9) v2@2135.05,1754.95 ; v1@2360,3137.5 cw(c2360,3107.32) 2381.34,3128.66 cw(c2402.68,3150) v1@2372.5,3150 ; v1(2360,3150) 2400,3110 v1(2470,3110) ; v1(2430,2200) v1(2630,2200) ; v1@2438.84,2191.16 cw(c2460.18,2169.82) 2460.18,2200 cw(c2460.18,2230.18) v1@2438.84,2208.84 ; v1@2461.16,3101.16 ccw(c2439.82,3079.82) 2439.82,3110 ccw(c2439.82,3140.18) v1@2461.16,3118.84 ; v1@2621.16,2191.16 ccw(c2599.82,2169.82) 2599.82,2200 ccw(c2599.82,2230.18) v1@2621.16,2208.84 ; v1(3040,2200) v1(3190,2200) ; v1@3048.84,2191.16 cw(c3070.18,2169.82) 3070.18,2200 cw(c3070.18,2230.18) v1@3048.84,2208.84 ; v1@3181.16,2191.16 ccw(c3159.82,2169.82) 3159.82,2200 ccw(c3159.82,2230.18) v1@3181.16,2208.84 ; v1@3250,2127.5 cw(c3250,2085.25) 3279.87,2115.13 ; v1@3250,2145 3290,2105 v1(3290,2050) ; v1(3257.56,2790) 3280,2812.44 3427.44,2812.44 3470,2855 v1(3515,2855) ; v1@3257.56,2802.5 ccw(c3257.56,2832.68) 3278.9,2811.34 ccw(c3300.24,2790) v1@3270.06,2790 ; v1@3262.5,2140 ccw(c3280.61,2140) 3267.8,2127.2 ; v1@3281.16,2058.84 ccw(c3259.82,2080.18) 3290,2080.18 ccw(c3320.18,2080.18) v1@3298.84,2058.84 ; v1@3506.16,2846.16 ccw(c3484.82,2824.82) 3484.82,2855 ccw(c3484.82,2885.18) v1@3506.16,2863.84
LED: D1.2 MCU1.25 | length 571.3
  Top Layer w10: D1.2@2094.7,655.3 cw(c2143.86,606.14) 2143.86,675.67 ; D1.2@2100,650 2125.67,675.67 MCU1.25@2328.46,675.67 ; D1.2@2101.77,648.23 cw(c2168.01,581.99) 2168.01,675.67 ; D1.2@2108.84,641.16 cw(c2192.15,557.85) 2192.15,675.67 ; D1.2@2115.91,634.09 cw(c2216.29,533.71) 2216.29,675.67
NetBAT1_1: BAT1.1 U3.1 | length 2153.4
  Top Layer w10: U3.1@2517.52,1612.36 2567.64,1612.36 v1(2580,1600) ; U3.1@2519.98,1612.36 cw(c2519.98,1539.98) v1@2571.16,1591.16 ; U3.1@2544.12,1612.36 cw(c2544.12,1564.12) v1@2578.23,1598.23 ; v1(3000,1600) 3279.68,1600 BAT1.1@3439.62,1440.06 ; v1@3008.84,1591.16 cw(c3030.18,1569.82) 3030.18,1600 cw(c3030.18,1630.18) v1@3008.84,1608.84 ; 3280.14,1599.55 ccw(c3439.62,1759.04) BAT1.1@3439.62,1533.49 ; 3297.21,1582.48 ccw(c3439.62,1724.89) BAT1.1@3439.62,1523.49 ; 3314.28,1565.41 ccw(c3439.62,1690.75) BAT1.1@3439.62,1513.49 ; 3331.35,1548.34 ccw(c3439.62,1656.61) BAT1.1@3439.62,1503.49 ; 3348.42,1531.27 ccw(c3439.62,1622.47) BAT1.1@3439.62,1493.49 ; 3351.42,1528.26 cw(c3292.75,1469.59) BAT1.1@3375.72,1469.59 ; 3365.49,1514.19 ccw(c3439.62,1588.33) BAT1.1@3439.62,1483.49 ; 3368.49,1511.19 cw(c3326.89,1469.59) BAT1.1@3385.72,1469.59
  Bottom Layer w10: v1@2580,1587.5 cw(c2580,1557.32) 2601.34,1578.66 cw(c2622.68,1600) v1@2592.5,1600 ; v1(2580,1600) 2620,1560 2850,1560 2890,1600 v1(3000,1600) ; v1@2991.16,1591.16 ccw(c2969.82,1569.82) 2969.82,1600 ccw(c2969.82,1630.18) v1@2991.16,1608.84
NetC5_1: C5.1 MCU1.7 | length 309.4
  Top Layer w10: MCU1.7@2426.89,1030 2426.89,1116.98 C5.1@2490.28,1180.37 ; C5.1@2467.78,1180.37 cw(c2413.46,1180.37) 2451.87,1141.96 cw(c2490.28,1103.55) C5.1@2490.28,1157.87 ; C5.1@2477.78,1180.37 cw(c2447.61,1180.37) 2468.94,1159.03 cw(c2490.28,1137.69) C5.1@2490.28,1167.87
NetC10_2: C10.2 U3.3 Y1.2 | length 1164.3
  Top Layer w10: U3.3@2517.52,1651.73 2578.27,1651.73 2600,1630 2690,1630 v1(2720,1600) ; v1@2707.5,1600 ccw(c2677.32,1600) 2698.66,1621.34 ccw(c2720,1642.68) v1@2720,1612.5 ; Y1.2@2925.86,1583.14 ccw(c2891.72,1617.28) 2940,1617.28 ccw(c2988.28,1617.28) Y1.2@2954.14,1583.14 ; v1@2931.16,1631.16 cw(c2909.82,1609.82) 2940,1609.82 cw(c2970.18,1609.82) v1@2948.84,1631.16 ; v1@2931.16,1648.84 ccw(c2909.82,1670.18) 2940,1670.18 ccw(c2970.18,1670.18) v1@2948.84,1648.84 ; Y1.2@2940,1530 Y1.2@2940,1550 v1(2940,1640) 2940,1690 2960,1710 C10.2@3030,1710 ; C10.2@3014.09,1694.09 ccw(c2975.68,1655.68) 2975.68,1710 ccw(c2975.68,1764.32) C10.2@3014.09,1725.91 ; C10.2@3021.16,1701.16 ccw(c2999.82,1679.82) 2999.82,1710 ccw(c2999.82,1740.18) C10.2@3021.16,1718.84
  Bottom Layer w10: v1(2720,1600) 2830,1600 2870,1640 v1(2940,1640) ; v1@2728.84,1591.16 cw(c2750.18,1569.82) 2750.18,1600 cw(c2750.18,1630.18) v1@2728.84,1608.84 ; v1@2931.16,1631.16 ccw(c2909.82,1609.82) 2909.82,1640 ccw(c2909.82,1670.18) v1@2931.16,1648.84
NetC11_2: C11.2 U3.4 Y1.1 | length 845.8
  Top Layer w10: U3.4@2517.52,1671.42 2588.58,1671.42 2610,1650 2690,1650 C11.2@2750,1710 2820,1710 2840,1690 Y1.1@2840,1550 ; C11.2@2727.5,1710 cw(c2673.18,1710) 2711.59,1671.59 cw(c2750,1633.18) C11.2@2750,1687.5 ; C11.2@2737.5,1710 cw(c2707.32,1710) 2728.66,1688.66 cw(c2750,1667.32) C11.2@2750,1697.5 ; C11.2@2758.84,1701.16 cw(c2780.18,1679.82) 2780.18,1710 cw(c2780.18,1740.18) C11.2@2758.84,1718.84 ; C11.2@2765.91,1694.09 cw(c2804.32,1655.68) 2804.32,1710 cw(c2804.32,1764.32) C11.2@2765.91,1725.91 ; Y1.1@2825.86,1583.14 ccw(c2791.72,1617.28) 2840,1617.28 ccw(c2888.28,1617.28) Y1.1@2854.14,1583.14
NetC12_1: C12.1 U3.7 | length 417.4
  Top Layer w10: U3.7@2517.52,1730.47 2629.53,1730.47 C12.1@2650,1710 ; U3.7@2546.26,1730.47 cw(c2546.26,1606.26) C12.1@2634.09,1694.09 ; 2570.4,1730.47 cw(c2570.4,1630.4) C12.1@2641.16,1701.16 ; 2594.54,1730.47 cw(c2594.54,1654.54) C12.1@2648.23,1708.23 ; 2618.68,1730.47 cw(c2618.68,1678.68) C12.1@2655.3,1715.3
NetD1_1: D1.1 R9.1 | length 365.5
  Top Layer w10: D1.1@1984.09,665.91 ccw(c1945.68,704.32) 2000,704.32 ccw(c2054.32,704.32) D1.1@2015.91,665.91 ; R9.1@1984.09,724.09 cw(c1945.68,685.68) 2000,685.68 cw(c2054.32,685.68) R9.1@2015.91,724.09 ; D1.1@1991.16,658.84 ccw(c1969.82,680.18) 2000,680.18 ccw(c2030.18,680.18) D1.1@2008.84,658.84 ; R9.1@1991.16,731.16 cw(c1969.82,709.82) 2000,709.82 cw(c2030.18,709.82) R9.1@2008.84,731.16 ; D1.1@2000,650 R9.1@2000,750
NetJ1_1: J1.1 MCU1.37 | length 193.2
  Top Layer w10: MCU1.37@2613.9,744.57 2665.43,744.57 2679.49,730.51 J1.1@2679.49,649.49 ; J1.1@2670.5,658.48 ccw(c2648.79,680.19) 2679.49,680.19 ; 2679.49,673.47 ccw(c2700.68,673.47) J1.1@2685.7,658.48
NetJ1_2: J1.2 MCU1.34 | length 232.7
  Top Layer w10: MCU1.34@2505.63,675.67 2505.63,624.37 2519.49,610.51 J1.2@2640.51,610.51 ; 2609.81,610.51 ccw(c2609.81,641.21) J1.2@2631.52,619.5 ; 2616.53,610.51 cw(c2616.53,589.32) J1.2@2631.52,604.3
NetR3_1: R3.1 USB1.2 | length 690.6
  Top Layer w10: USB1.2@2024.5,220 2024.5,414.5 2090,480 2290,480 R3.1@2340,430 ; R3.1@2317.5,430 ccw(c2263.18,430) 2301.59,468.41 ccw(c2340,506.82) R3.1@2340,452.5 ; R3.1@2327.5,430 ccw(c2297.32,430) 2318.66,451.34 ccw(c2340,472.68) R3.1@2340,442.5
NetR5_1: R5.1 R6.1 USB1.3 | length 1004.5
  Top Layer w10: USB1.3@2050,220 2050,370 2110,430 R6.1@2240,430 2290,380 2390,380 R5.1@2440,430 ; R6.1@2224.09,414.09 ccw(c2185.68,375.68) 2185.68,430 ccw(c2185.68,484.32) R6.1@2224.09,445.91 ; R6.1@2231.16,421.16 ccw(c2209.82,399.82) 2209.82,430 ccw(c2209.82,460.18) R6.1@2231.16,438.84 ; R6.1@2240,407.5 cw(c2240,353.18) 2278.41,391.59 cw(c2316.82,430) R6.1@2262.5,430 ; R6.1@2240,417.5 cw(c2240,387.32) 2261.34,408.66 cw(c2282.68,430) R6.1@2252.5,430 ; R5.1@2417.5,430 cw(c2363.18,430) 2401.59,391.59 cw(c2440,353.18) R5.1@2440,407.5 ; R5.1@2427.5,430 cw(c2397.32,430) 2418.66,408.66 cw(c2440,387.32) R5.1@2440,417.5
NetR10_2: R10.2 U4.1 | length 356.2
  Top Layer w10: R10.2@650,3700 750,3720 U4.1@845.51,3725 ; R10.2@656.93,3710.4 ccw(c673.67,3735.51) 679.59,3705.92 ccw(c685.51,3676.33) R10.2@660.4,3693.07 ; R10.2@662.48,3718.72 ccw(c692.61,3763.92) 703.26,3710.65 ccw(c713.92,3657.39) R10.2@668.72,3687.52 ; 793.71,3722.29 ccw(c792.56,3744.32) U4.1@808.95,3729.56 ; 801.65,3722.7 cw(c802.22,3711.9) U4.1@809.46,3719.94
NetR11_2: R11.2 U4.2 | length 372.3
  Top Layer w10: R11.2@650,3600 740,3660 U4.2@845.51,3675 ; R11.2@652.45,3612.26 ccw(c658.37,3641.85) 675.11,3616.74 ccw(c691.85,3591.63) R11.2@662.26,3597.55 ; R11.2@654.41,3622.06 ccw(c665.07,3675.33) 695.2,3630.13 ccw(c725.33,3584.93) R11.2@672.06,3595.59 ; 787.76,3666.79 ccw(c783.32,3698.05) U4.2@808.57,3679.09
NetR12_1: R12.1 U4.15 | length 603.8
  Top Layer w10: R12.1@650,3800 880,3800 950,3760 970,3700 1000,3678.88 U4.15@1034.49,3675 ; R12.1@658.84,3791.16 cw(c680.18,3769.82) 680.18,3800 cw(c680.18,3830.18) R12.1@658.84,3808.84 ; R12.1@665.91,3784.09 cw(c704.32,3745.68) 704.32,3800 cw(c704.32,3854.32) R12.1@665.91,3815.91 ; 987.52,3687.66 cw(c975.21,3670.18) U4.15@996.28,3673.83 ; 993.24,3683.64 ccw(c999.86,3693.05) U4.15@1001.83,3681.71
NetR13_2: R13.2 U4.3 | length 404.1
  Top Layer w10: R13.2@648.93,3522.47 ccw(c646.35,3576.73) 686.54,3540.19 ccw(c726.73,3503.65) R13.2@672.47,3501.07 ; R13.2@649.41,3512.49 ccw(c647.97,3542.63) 670.3,3522.33 ccw(c692.63,3502.03) R13.2@662.49,3500.59 ; R13.2@650,3500 750,3610 U4.3@845.51,3625 ; 786.88,3615.79 ccw(c781.74,3648.52) U4.3@808.51,3629.01
NetR14_2: R14.2 U4.4 | length 434.5
  Top Layer w10: R14.2@650,3400 710,3460 750,3540 780,3570 U4.4@845.51,3575 ; R14.2@650,3412.5 ccw(c650,3442.68) 671.34,3421.34 ccw(c692.68,3400) R14.2@662.5,3400 ; R14.2@650,3422.5 ccw(c650,3476.82) 688.41,3438.41 ccw(c726.82,3400) R14.2@672.5,3400 ; 792.03,3570.92 ccw(c790.16,3595.47) U4.4@808.85,3579.44
NetR15_2: R15.2 U4.5 | length 476.2
  Top Layer w10: R15.2@650,3300 698,3340 760,3490 790,3520 U4.5@845.51,3525 ; R15.2@651.13,3312.45 ccw(c653.86,3342.5) 673.18,3319.32 ccw(c692.5,3296.14) R15.2@662.45,3298.87 ; R15.2@652.04,3322.41 ccw(c656.95,3376.5) 691.73,3334.77 ccw(c726.5,3293.05) R15.2@672.41,3297.96 ; 791.1,3520.1 ccw(c788.76,3546.08) U4.5@808.79,3529.36
NetR16_2: R16.2 U4.6 | length 519.7
  Top Layer w10: R16.2@650,3200 710,3260 747.78,3368.49 778.44,3456.56 790,3470 U4.6@845.51,3475 ; R16.2@650,3212.5 ccw(c650,3242.68) 671.34,3221.34 ccw(c692.68,3200) R16.2@662.5,3200 ; R16.2@650,3222.5 ccw(c650,3276.82) 688.41,3238.41 ccw(c726.82,3200) R16.2@672.5,3200 ; 791.1,3470.1 ccw(c788.76,3496.08) U4.6@808.79,3479.36
NetR17_2: R17.2 U4.7 | length 572.1
  Top Layer w10: R17.2@650,3100 740,3190 781.06,3400 790,3420 U4.7@845.51,3425 ; R17.2@650,3112.5 ccw(c650,3142.68) 671.34,3121.34 ccw(c692.68,3100) R17.2@662.5,3100 ; R17.2@650,3122.5 ccw(c650,3176.82) 688.41,3138.41 ccw(c726.82,3100) R17.2@672.5,3100 ; 791.1,3420.1 ccw(c788.76,3446.08) U4.7@808.79,3429.36
NetR18_2: R18.2 U5.1 | length 371.1
  Top Layer w10: R18.2@650,2900 740,2963.32 U5.1@845.51,2975 ; R18.2@652.14,2912.31 ccw(c657.32,2942.05) 674.68,2917.36 ccw(c692.05,2892.68) R18.2@662.31,2897.86 ; R18.2@653.86,2922.17 ccw(c663.17,2975.68) 694.43,2931.26 ccw(c725.68,2886.83) R18.2@672.17,2896.14 ; 789.74,2968.83 ccw(c786.63,2996.93) U5.1@808.7,2979.26
NetR19_2: R19.2 U5.2 | length 424.7
  Top Layer w10: R19.2@650,2800 760,2900 U5.2@845.51,2925 ; R19.2@650.59,2812.49 ccw(c652.03,2842.63) 672.33,2820.3 ccw(c692.63,2797.97) R19.2@662.49,2799.41 ; R19.2@651.07,2822.47 ccw(c653.65,2876.73) 690.19,2836.54 ccw(c726.73,2796.35) R19.2@672.47,2798.93 ; 780.23,2905.92 ccw(c767.15,2950.66) U5.2@808.04,2928.27 ; 803.41,2912.69 ccw(c797.1,2934.26) U5.2@816.81,2923.47
NetR20_1: R20.1 U5.15 | length 615.7
  Top Layer w10: R20.1@650,3000 660,3010 910,3010 958,2946 970,2930 U5.15@1034.49,2925 ; R20.1@651.77,2998.23 cw(c680.18,2969.82) 680.18,3010 cw(c680.18,3030.18) R20.1@665.91,3015.91 ; R20.1@658.84,2991.16 cw(c704.32,2945.68) 704.32,3010 ; R20.1@665.91,2984.09 cw(c728.46,2921.54) 728.46,3010 ; 980.93,2929.15 cw(c979.01,2904.47) U5.15@997.82,2920.57
NetR21_2: R21.2 U5.3 | length 440.2
  Top Layer w10: R21.2@645.12,2721.96 ccw(c633.34,2774.99) 679.16,2745.83 ccw(c724.99,2716.66) R21.2@671.96,2704.88 ; R21.2@647.29,2712.2 ccw(c640.74,2741.66) 666.2,2725.46 ccw(c691.66,2709.26) R21.2@662.2,2702.71 ; R21.2@650,2700 720,2810 780,2860 U5.3@845.51,2875 ; 783.01,2860.69 ccw(c773.99,2900.11) U5.3@808.25,2878.62
NetR22_2: R22.2 U5.4 | length 483.2
  Top Layer w10: R22.2@650,2600 700,2650 746.67,2770 780,2810 U5.4@845.51,2825 ; R22.2@650,2612.5 ccw(c650,2642.68) 671.34,2621.34 ccw(c692.68,2600) R22.2@662.5,2600 ; R22.2@650,2622.5 ccw(c650,2676.82) 688.41,2638.41 ccw(c726.82,2600) R22.2@672.5,2600 ; 783.01,2810.69 ccw(c773.99,2850.11) U5.4@808.25,2828.62
NetR23_2: R23.2 U5.5 | length 531.7
  Top Layer w10: R23.2@650,2500 710,2560 731.02,2635.69 751.8,2710.47 760,2740 780,2760 U5.5@845.51,2775 ; R23.2@650,2512.5 ccw(c650,2542.68) 671.34,2521.34 ccw(c692.68,2500) R23.2@662.5,2500 ; R23.2@650,2522.5 ccw(c650,2576.82) 688.41,2538.41 ccw(c726.82,2500) R23.2@672.5,2500 ; 783.01,2760.69 ccw(c773.99,2800.11) U5.5@808.25,2778.62
NetR24_2: R24.2 U5.6 | length 572.7
  Top Layer w10: R24.2@650,2400 730,2480 752.7,2604.28 768.61,2691.39 790,2720 U5.6@845.51,2725 ; R24.2@650,2412.5 ccw(c650,2442.68) 671.34,2421.34 ccw(c692.68,2400) R24.2@662.5,2400 ; R24.2@650,2422.5 ccw(c650,2476.82) 688.41,2438.41 ccw(c726.82,2400) R24.2@672.5,2400 ; 791.1,2720.1 ccw(c788.76,2746.08) U5.6@808.79,2729.36
NetR25_2: R25.2 U5.7 | length 650.7
  Top Layer w10: R25.2@650,2300 750,2400 771.05,2531.58 790,2650 800,2670 U5.7@845.51,2675 ; R25.2@650,2312.5 ccw(c650,2342.68) 671.34,2321.34 ccw(c692.68,2300) R25.2@662.5,2300 ; R25.2@650,2322.5 ccw(c650,2376.82) 688.41,2338.41 ccw(c726.82,2300) R25.2@672.5,2300 ; 796.55,2663.09 cw(c807.02,2657.86) U5.7@811.44,2668.69 ; 797.22,2664.43 cw(c821.35,2652.36) U5.7@813.03,2678.03 ; 801.37,2672.74 cw(c811.11,2667.88) U5.7@815.22,2677.95
NetR26_2: R26.2 U6.1 | length 405.9
  Top Layer w10: R26.2@647.53,2122.36 ccw(c641.55,2176.35) 683.95,2142.4 ccw(c726.35,2108.45) R26.2@672.36,2102.47 ; R26.2@648.63,2112.42 ccw(c645.31,2142.42) 668.86,2123.56 ccw(c692.42,2104.69) R26.2@662.42,2101.37 ; R26.2@650,2100 700,2162.44 740,2212.39 U6.1@845.51,2225 ; 789.17,2218.27 ccw(c785.71,2247.26) U6.1@808.66,2229.21
NetR27_2: R27.2 U6.2 | length 501.1
  Top Layer w10: R27.2@641.03,2020.63 ccw(c600.03,2114.94) 695.7,2077.25 ; R27.2@645.02,2011.46 ccw(c613.64,2083.63) 686.86,2054.79 ; R27.2@649,2002.29 ccw(c627.25,2052.32) 678.01,2032.32 ; R27.2@650,2000 670,2012 708.61,2110 714.6,2117.62 750,2162.6 U6.2@845.51,2175 ; 788.52,2167.6 ccw(c784.62,2197.64) U6.2@808.62,2179.16
NetR28_1: R28.1 U6.15 | length 604
  Top Layer w10: R28.1@650,2200 720,2270 860,2270 940,2240 980,2179.22 U6.15@1034.49,2175 ; R28.1@650,2212.5 ccw(c650,2242.68) 671.34,2221.34 ccw(c692.68,2200) R28.1@662.5,2200 ; R28.1@650,2222.5 ccw(c650,2276.82) 688.41,2238.41 ccw(c726.82,2200) R28.1@672.5,2200 ; 980.93,2179.15 cw(c979.01,2154.47) U6.15@997.82,2170.57
NetR29_2: R29.2 U6.3 | length 495
  Top Layer w10: R29.2@650,1900 690,1933.33 ; R29.2@651.51,1912.41 ccw(c654.8,1939.43) 672.22,1918.52 ccw(c689.64,1897.61) R29.2@662.48,1899.25 ; R29.2@652.72,1922.34 ccw(c658.64,1970.97) 690,1933.33 ; R29.2@672.46,1898.65 cw(c721.36,1895.7) 690,1933.33 ; 794.07,2122.56 ccw(c793.05,2144.07) U6.3@808.98,2129.58 ; 801.26,2122.9 cw(c801.79,2111.56) U6.3@809.43,2119.96 ; U6.3@845.51,2125 780,2121.9 767.2,2118.09 740,2110 710,2050 690,1933.33
NetR30_2: R30.2 U6.4 | length 537.6
  Top Layer w10: R30.2@648.5,1822.45 ccw(c644.89,1876.65) 685.77,1840.88 ccw(c726.65,1805.11) R30.2@672.45,1801.5 ; R30.2@649.17,1812.47 ccw(c647.16,1842.58) 669.87,1822.71 ccw(c692.58,1802.84) R30.2@662.47,1800.83 ; R30.2@650,1800 702.5,1860 730,2010 760,2060 772.69,2062.23 U6.4@845.51,2075 ; 785.82,2064.53 ccw(c779.77,2099.03) U6.4@808.44,2078.91
NetR31_2: R31.2 U6.5 | length 516.4
  Top Layer w10: R31.2@650,1700 690,1720 ; R31.2@660.16,1720.07 ccw(c675.15,1749.69) 690,1720 ; R31.2@672.16,1696.09 cw(c704.84,1690.31) 690,1720 ; 784.55,2012.89 ccw(c777.27,2049.57) U6.5@808.35,2028.79 ; U6.5@845.51,2025 781.19,2012.22 770,2010 750,1980 730.78,1859.88 690,1720
NetR32_2: R32.2 U6.6 | length 612.7
  Top Layer w10: R32.2@648.63,1622.46 ccw(c645.32,1676.68) 686,1640.68 ccw(c726.68,1604.68) R32.2@672.46,1601.37 ; R32.2@649.24,1612.48 ccw(c647.4,1642.6) 670,1622.6 ccw(c692.6,1602.6) R32.2@662.48,1600.76 ; R32.2@650,1600 710,1667.79 740,1788.66 747.91,1820.52 ; 748.05,1820.49 780,1950.81 790,1970 U6.6@845.51,1975 ; 791.1,1970.1 ccw(c788.76,1996.08) U6.6@808.79,1979.36
NetR33_2: R33.2 U6.7 | length 656
  Top Layer w10: R33.2@650,1500 740,1590 755.3,1689.41 786.17,1890 795.78,1910 U6.7@845.51,1925 ; R33.2@650,1512.5 ccw(c650,1542.68) 671.34,1521.34 ccw(c692.68,1500) R33.2@662.5,1500 ; R33.2@650,1522.5 ccw(c650,1576.82) 688.41,1538.41 ccw(c726.82,1500) R33.2@672.5,1500 ; 804.02,1912.49 ccw(c798,1932.45) U6.7@816.91,1923.66 ; U6.7@825.39,1918.93 ccw(c825.12,1919.84) U6.7@825.97,1919.44
NetR34_2: R34.2 U7.1 | length 432
  Top Layer w10: R34.2@647.96,1322.41 ccw(c643.05,1376.5) 684.77,1341.73 ccw(c726.5,1306.95) R34.2@672.41,1302.04 ; R34.2@648.87,1312.45 ccw(c646.14,1342.5) 669.32,1323.18 ccw(c692.5,1303.86) R34.2@662.45,1301.13 ; R34.2@650,1300 691.67,1350 740,1420 780,1470 U7.1@845.51,1475 ; 792.03,1470.92 ccw(c790.16,1495.47) U7.1@808.85,1479.44
NetR35_2: R35.2 U7.2 | length 481.7
  Top Layer w10: R35.2@650,1200 690,1240 698.94,1276.9 712.71,1333.77 716.12,1347.83 720.62,1352.92 780,1420 U7.2@845.51,1425 ; R35.2@650,1212.5 ccw(c650,1242.68) 671.34,1221.34 ccw(c692.68,1200) R35.2@662.5,1200 ; R35.2@650,1222.5 ccw(c650,1276.82) 688.41,1238.41 ccw(c726.82,1200) R35.2@672.5,1200 ; 792.03,1420.92 ccw(c790.16,1445.47) U7.2@808.85,1429.44
NetR36_1: R36.1 U7.15 | length 630.7
  Top Layer w10: R36.1@648.82,1422.47 ccw(c645.96,1476.71) 686.34,1440.38 ccw(c726.71,1404.04) R36.1@672.47,1401.18 ; R36.1@649.34,1412.48 ccw(c647.76,1442.62) 670.19,1422.43 ccw(c692.62,1402.24) R36.1@662.48,1400.66 ; R36.1@650,1400 740,1500 860,1530 899.43,1513.4 936,1498 960,1450 980,1430 U7.15@1034.49,1425 ; 979.96,1430 cw(c977.56,1403.84) U7.15@997.76,1420.64
NetR37_2: R37.2 U7.3 | length 525.5
  Top Layer w10: R37.2@650,1100 690,1140 703.38,1188.96 739.18,1320 761.58,1347.43 780,1370 U7.3@845.51,1375 ; R37.2@650,1112.5 ccw(c650,1142.68) 671.34,1121.34 ccw(c692.68,1100) R37.2@662.5,1100 ; R37.2@650,1122.5 ccw(c650,1176.82) 688.41,1138.41 ccw(c726.82,1100) R37.2@672.5,1100 ; 792.03,1370.92 ccw(c790.16,1395.47) U7.3@808.85,1379.44
NetR38_2: R38.2 U7.4 | length 573.9
  Top Layer w10: R38.2@650,1000 700,1050 745.51,1270 780,1320 U7.4@845.51,1325 ; R38.2@650,1012.5 ccw(c650,1042.68) 671.34,1021.34 ccw(c692.68,1000) R38.2@662.5,1000 ; R38.2@650,1022.5 ccw(c650,1076.82) 688.41,1038.41 ccw(c726.82,1000) R38.2@672.5,1000 ; 792.03,1320.92 ccw(c790.16,1345.47) U7.4@808.85,1329.44
NetR39_2: R39.2 U7.5 | length 619.1
  Top Layer w10: R39.2@650,910 710,960 777.55,1260 U7.5@845.51,1275 ; R39.2@651.13,922.45 ccw(c653.86,952.5) 673.18,929.32 ccw(c692.5,906.14) R39.2@662.45,908.87 ; R39.2@652.04,932.41 ccw(c656.95,986.5) 691.73,944.77 ccw(c726.5,903.05) R39.2@672.41,907.96 ; 783.42,1261.29 ccw(c774.88,1299.98) U7.5@808.27,1278.66
NetR40_2: R40.2 U7.6 | length 634.4
  Top Layer w10: R40.2@646.09,822.16 ccw(c636.65,875.65) 681.15,844.5 ccw(c725.65,813.35) R40.2@672.16,803.91 ; R40.2@647.83,812.31 ccw(c642.58,842.03) 667.31,824.72 ccw(c692.03,807.42) R40.2@662.31,802.17 ; R40.2@650,800 720,900 782.58,1196.44 796.53,1220 U7.6@845.51,1225
NetR41_2: R41.2 U7.7 | length 879.5
  Top Layer w10: R41.2@650,700 750,800 900,850 940,890 940,1150 915,1175 U7.7@845.51,1175 ; R41.2@650,712.5 ccw(c650,742.68) 671.34,721.34 ccw(c692.68,700) R41.2@662.5,700 ; R41.2@650,722.5 ccw(c650,776.82) 688.41,738.41 ccw(c726.82,700) R41.2@672.5,700 ; U7.7@881.82,1170.18 cw(c893.45,1158.56) 893.45,1175 cw(c893.45,1191.44) U7.7@881.82,1179.82
NetR42_2: R42.2 U8.1 | length 627.3
  Top Layer w10: R42.2@650,500 705.41,550 724.64,630 770,707.62 ; R42.2@650.64,512.48 ccw(c652.19,542.62) 672.4,520.22 ccw(c692.62,497.81) R42.2@662.48,499.36 ; R42.2@651.15,522.47 ccw(c653.94,576.72) 690.33,536.39 ccw(c726.72,496.06) R42.2@672.47,498.85 ; 780,709.65 ccw(c771.1,753.42) U8.1@808.34,728.76 ; 782.96,710.6 ccw(c773.86,750.13) U8.1@808.24,728.61 ; 803.66,714.46 ccw(c799.57,734.57) U8.1@816.67,723.24 ; U8.1@845.51,725 770,707.62 ; U8.1@855.51,725 845.91,723.05 770,707.62
NetR43_2: R43.2 U8.2 | length 593.8
  Top Layer w10: R43.2@650,400 724.89,470 739.57,524.45 775,655.85 800,672.21 ; R43.2@650.42,412.49 ccw(c651.44,442.65) 672.05,420.61 ccw(c692.65,398.56) R43.2@662.49,399.58 ; R43.2@650.76,422.49 ccw(c652.59,476.78) 689.68,437.09 ccw(c726.78,397.41) R43.2@672.49,399.24 ; 786.55,663.41 cw(c805.53,634.4) U8.2@812.62,668.33 ; 802.37,672.35 cw(c802.97,662.51) U8.2@809.5,669.9 ; U8.2@845.51,675 800,672.21 ; U8.2@855.51,675 845.54,674.5 800,672.21
NetR44_1: R44.1 U8.15 | length 817.9
  Top Layer w10: R44.1@646.1,622.16 ccw(c636.68,675.66) 681.17,644.49 ccw(c725.66,613.32) R44.1@672.16,603.9 ; R44.1@647.83,612.31 ccw(c642.6,642.03) 667.31,624.72 ccw(c692.03,607.4) R44.1@662.31,602.17 ; R44.1@650,600 750,742.75 800,770 930,760 970,700 ; 966.15,701.49 cw(c946.16,649.92) U8.15@996.76,672.25 ; 984.27,695.21 cw(c972.38,659.77) U8.15@1005.85,676.42 ; 988.66,692.77 cw(c977.39,663.7) U8.15@1005.91,676.29 ; 1007.16,687.53 cw(c1002.95,674.98) U8.15@1014.8,680.87 ; U8.15@1011.17,684.04 cw(c1008.63,677.49) U8.15@1015.06,680.32 ; U8.15@1034.49,675 970,700 ; U8.15@1035.5,678.02 970,700
NetR45_2: R45.2 U8.3 | length 671.1
  Top Layer w10: R45.2@650,300 754.44,380 787.04,600 800,620.76 ; R45.2@651.64,312.39 ccw(c655.61,342.31) 673.96,318.35 ccw(c692.31,294.39) R45.2@662.39,298.36 ; R45.2@652.96,322.3 ccw(c660.09,376.15) 693.12,333.03 ccw(c726.15,289.91) R45.2@672.3,297.04 ; 784.79,596.41 cw(c826.68,570.26) U8.3@815.55,618.36 ; 797.58,616.89 cw(c818.98,603.52) U8.3@813.3,628.11 ; U8.3@845.51,625 800,620.76 ; U8.3@855.51,625 845.57,624.24 800,620.76
NetU4_9: U4.9 U5.14 | length 673.4
  Top Layer w10: U5.14@1034.49,2875 1085,2875 1110,2900 1110,3350 1085,3375 U4.9@1034.49,3375 ; U5.14@1070.8,2870.18 cw(c1082.43,2858.56) 1082.43,2875 cw(c1082.43,2891.44) U5.14@1070.8,2879.82 ; U4.9@1070.8,3370.18 cw(c1082.43,3358.56) 1082.43,3375 cw(c1082.43,3391.44) U4.9@1070.8,3379.82
NetU5_9: U5.9 U6.14 | length 673.4
  Top Layer w10: U6.14@1034.49,2125 1085,2125 1110,2150 1110,2600 1085,2625 U5.9@1034.49,2625 ; U6.14@1070.8,2120.18 cw(c1082.43,2108.56) 1082.43,2125 cw(c1082.43,2141.44) U6.14@1070.8,2129.82 ; U5.9@1070.8,2620.18 cw(c1082.43,2608.56) 1082.43,2625 cw(c1082.43,2641.44) U5.9@1070.8,2629.82